# Altium PCB PCB1.PcbDoc
Units mm, origin at the board's own origin, x right, y up, seen from the top; angles counter-clockwise.
Board outline 56 x 65 mm, 4 copper layers (Top Layer, Mid Layer 1, Mid Layer 2, Bottom Layer), stack 1.57 mm thick; 44 components, 38 nets, 199 pads, 66 vias.
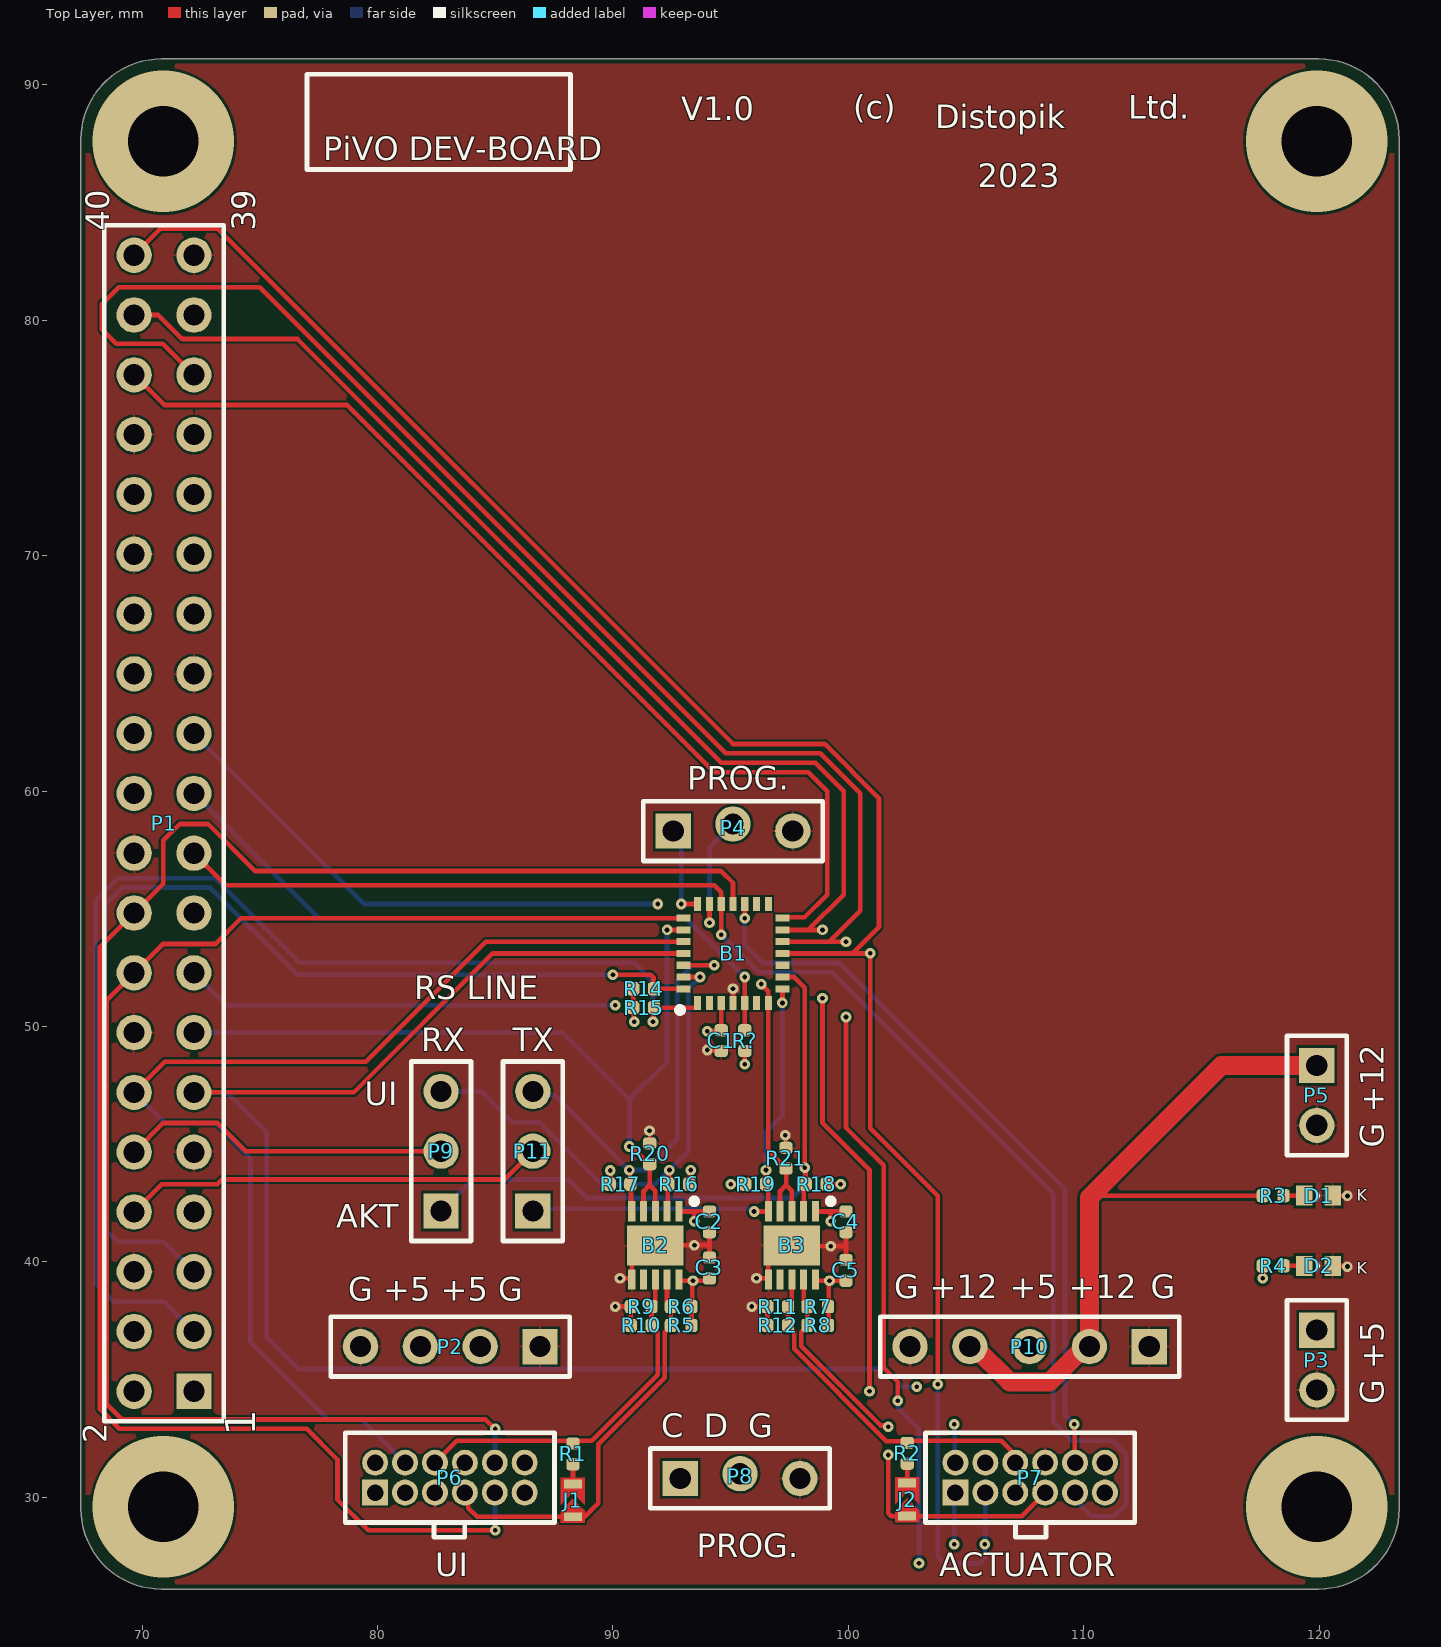
[diagram p0: Top Layer view]
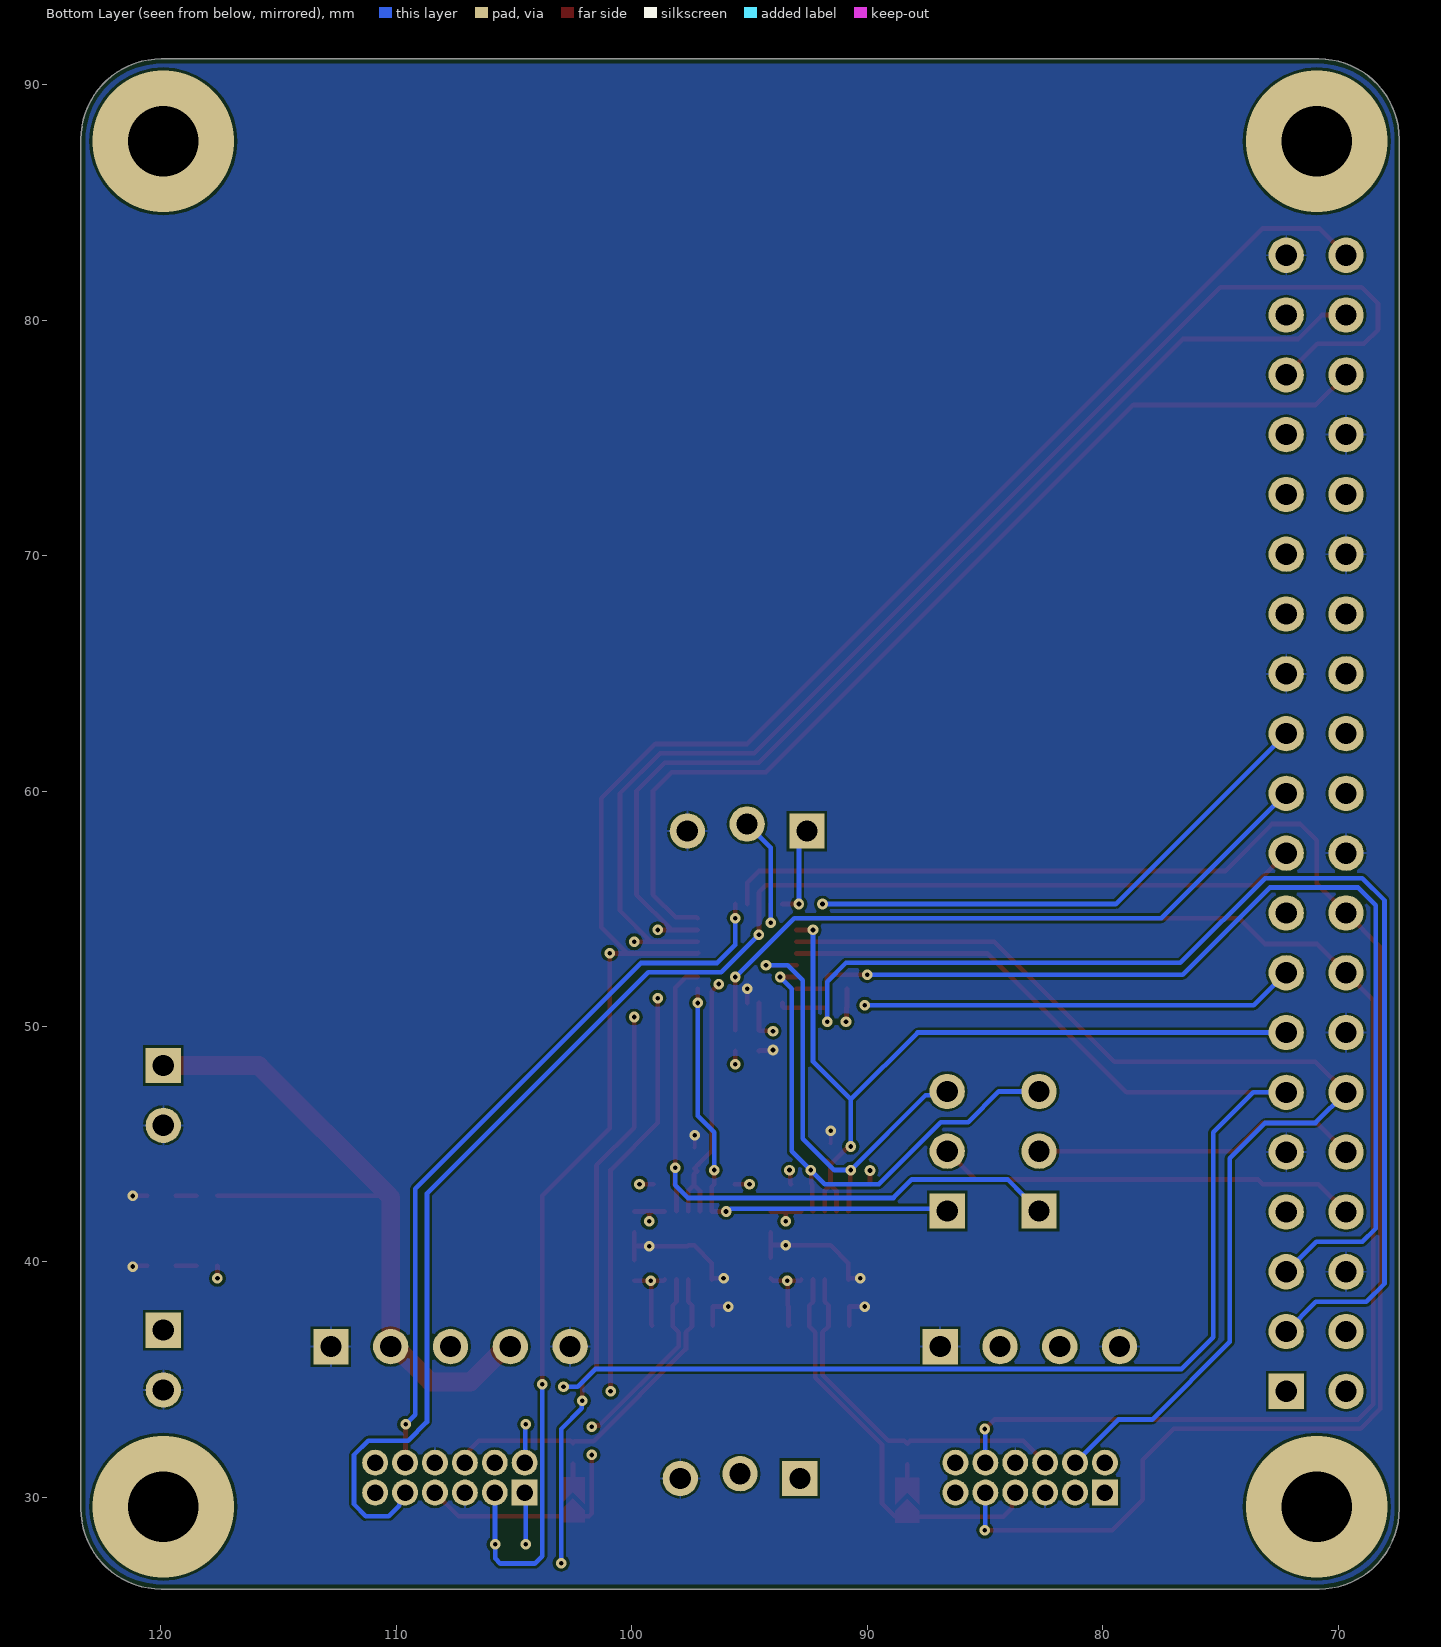
[diagram p1: Bottom Layer view, seen from below]
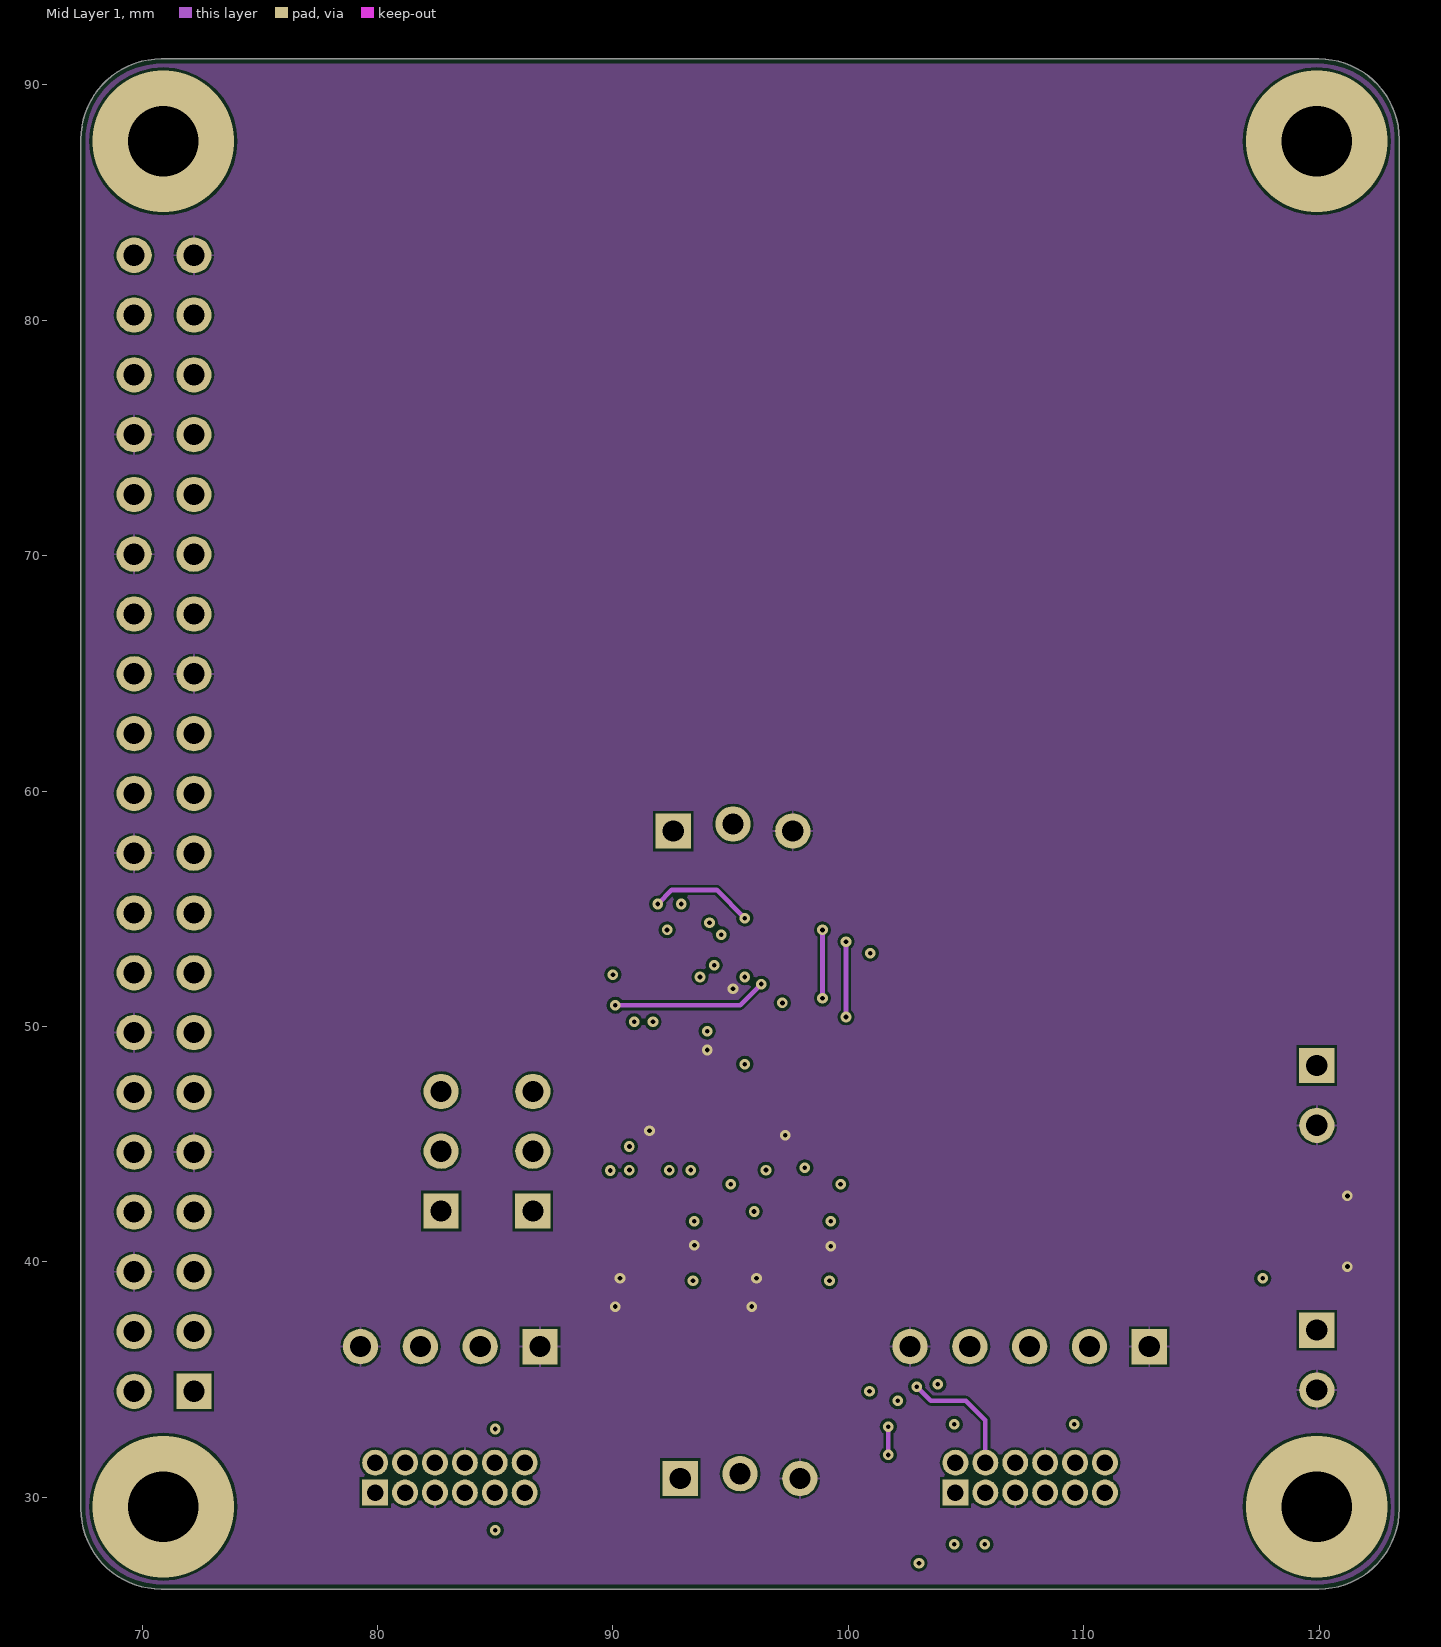
[diagram p2: Mid Layer 1]
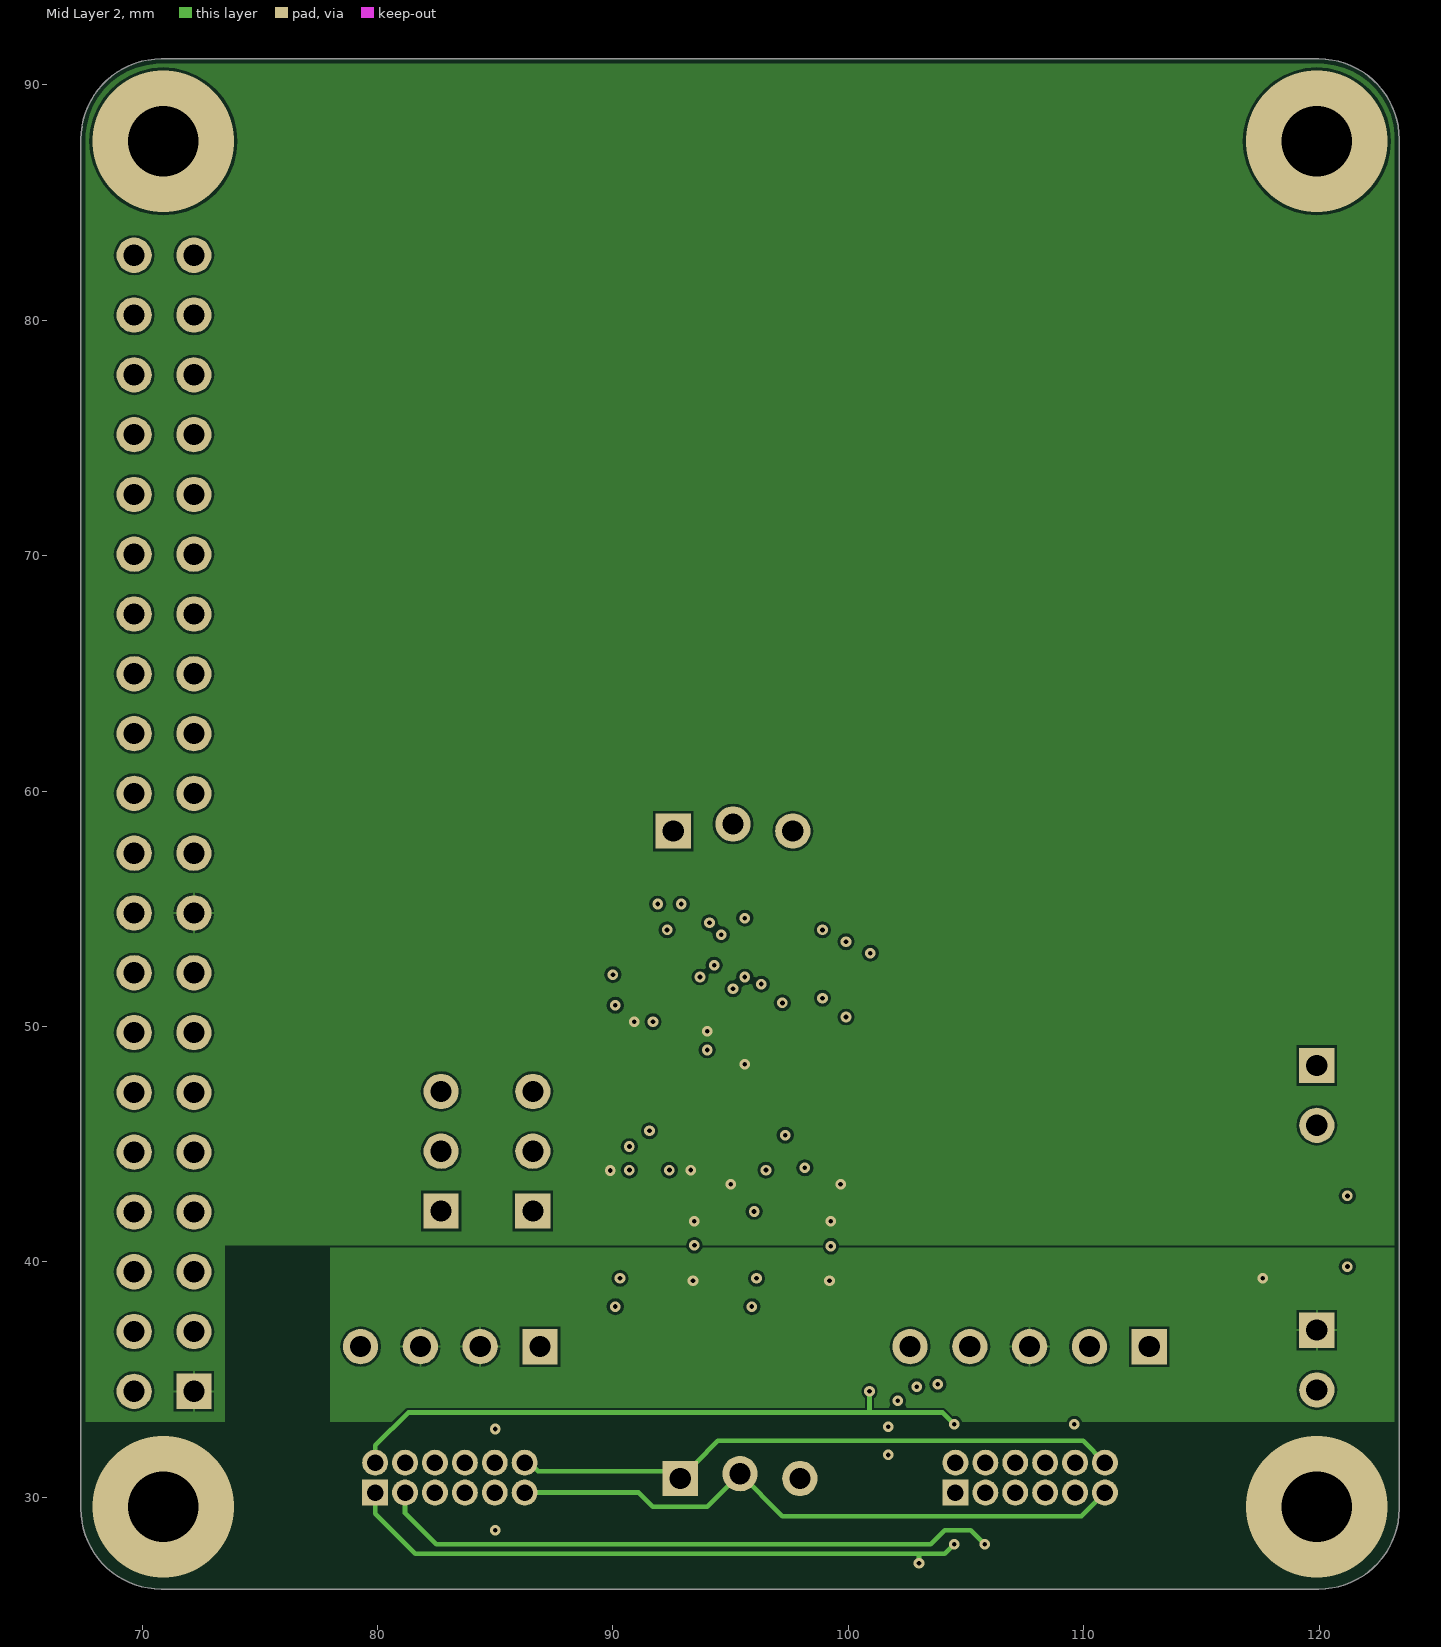
[diagram p3: Mid Layer 2]
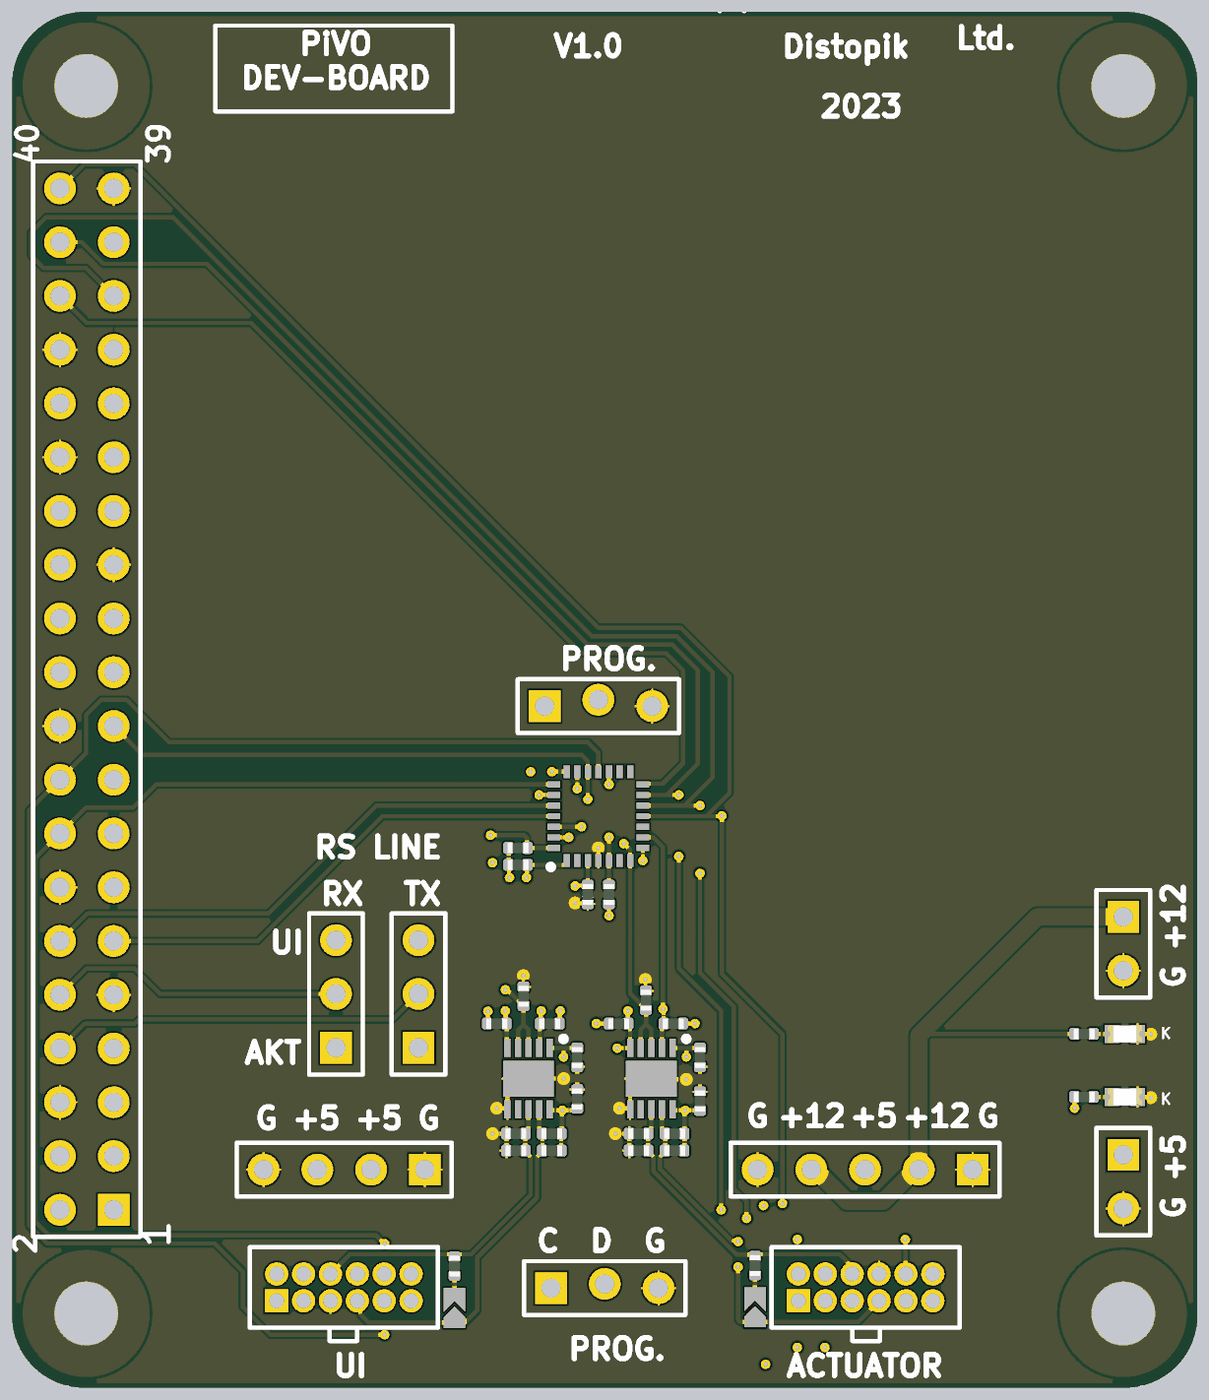
[diagram p4: 3D render of the assembled board from above, using the file's embedded part models]

## Layer stack, top to bottom
Top Solder: solder mask 0.0127, Solder Resist, Dk 3.8
Top Layer: signal copper 0.035
Dielectric 1: prepreg 0.2, 7628, Dk 4.6
Mid Layer 1: signal copper 0.0175
Core: core 1.065, FR-4, Dk 4.5
Mid Layer 2: signal copper 0.0175
Dielectric 2: prepreg 0.2, 7628, Dk 4.6
Bottom Layer: signal copper 0.035
Bottom Solder: solder mask 0.0127, Solder Resist, Dk 3.8

## Board outline
67.4,29.507 ccw(c70.807,29.507) 70.807,26.1 119.986,26.1 ccw(c119.986,29.514) 123.4,29.514 123.4,87.686 ccw(c119.986,87.686) 119.986,91.1 70.814,91.1 ccw(c70.814,87.686) 67.4,87.686

## Design rules (kind name [scope] priority, off if disabled: settings)
BoardOutlineClearance [All] p1: gap=0.2 ignorepadtopadclearanceinfootprint=FALSE
Clearance [All] p1: gap=0.102 ignorepadtopadclearanceinfootprint=FALSE except(0.127: Arc-Via Track-Via SMDPad-Via THPad-Via Via-Via Via-Fill Via-Poly Via-Region Via-Text; 0.25: Arc-Hole Track-Hole SMDPad-Hole THPad-Hole Via-Hole Fill-Hole Poly-Hole Region-Hole Text-Hole)
ComponentClearance [All] p1: gap=0.102 collisioncheckmode=3 verticalgap=0.102 showdistances=TRUE
DiffPairsRouting [All] p1: maxlimit=0.102 minlimit=0.102 mostfreqgap=0.102 toplayer_minwidth=0.102 toplayer_maxwidth=1816.048 toplayer_prefwidth=0.102 midlayer1_minwidth=0.102 midlayer1_maxwidth=1816.048 midlayer1_prefwidth=0.102 midlayer2_minwidth=0.102 midlayer2_maxwidth=1816.048 midlayer2_prefwidth=0.102 bottomlayer_minwidth=0.102 bottomlayer_maxwidth=1816.048 bottomlayer_prefwidth=0.102 maxuncoupledlength=12.7
Height [All] p1: minheight=0 maxheight=1816.048 prefheight=12.7
HoleSize [All] p1: absolutevalues=TRUE maxlimit=6.3 minlimit=0.2 maxpercent=80.000 minpercent=20.000
HoleToHoleClearance [All] p1: gap=0.25 allowstackedmicrovias=FALSE
MinimumAnnularRing [All] p1: minimumring=0.076
MinimumSolderMaskSliver [All] p1: minsoldermaskwidth=0
PlaneClearance [All] p1: clearance=0.102
PlaneConnect PlaneConnectPowerPads [InPadClass('PowerPads')] p1: planeconnectstyle=Direct reliefexpansion=0.508 reliefentries=4 reliefconductorwidth=0.254 reliefairgap=0.254
PlaneConnect [All] p2: pad.planeconnectstyle=Relief pad.reliefexpansion=0.3 pad.reliefentries=4 pad.reliefconductorwidth=0.102 pad.reliefairgap=0.102 via.planeconnectstyle=Direct via.reliefexpansion=0.3 via.reliefentries=4 via.reliefconductorwidth=0.127 via.reliefairgap=0.127
PolygonConnect PolygonConnectPowerPads [All vs (InPadClass('PowerPads'))] p1: connectstyle=Direct reliefconductorwidth=0.254 reliefentries=4 polygonreliefangle="90 Angle" airgapwidth=0.254
PolygonConnect [All] p2: thpad.connectstyle=Relief thpad.reliefconductorwidth=0.102 thpad.reliefentries=4 thpad.polygonreliefangle="90 Angle" thpad.airgapwidth=0.102 smdpad.connectstyle=Relief smdpad.reliefconductorwidth=0.102 smdpad.reliefentries=4 smdpad.polygonreliefangle="90 Angle" smdpad.airgapwidth=0.102 via.connectstyle=Direct via.reliefconductorwidth=0.127 via.reliefentries=4 via.polygonreliefangle="90 Angle" via.airgapwidth=0.127
RoutingVias [All] p1: holewidth=0.2 width=0.45 viastyle="Through Hole" minholewidth=0.2 minwidth=0.45 maxholewidth=6.3 maxwidth=6.55
SilkToSilkClearance [All] p1: silktosilkclearance=0
SilkToSolderMaskClearance [IsPad] p1: minsilkscreentomaskgap=0.102 clearancetoexposedcopper=TRUE
SolderMaskExpansion [All] p1: expansion=0.075 istentingtop=FALSE
Width [All] p1: maxlimit=1816.048 minlimit=0.102 preferedwidth=0.102
20 further rules are at their usual default settings.

## Components (designator, comment, footprint, x,y, rotation, side; value= is the part's Value field where it differs from the comment)
B1 "STM32C031G6U6" QFN50P400X400X60-28N-D 95.1,53.1 r90 top
B2 "XR33202EEHBTR-F" SON50P300X300X80-11N-D 91.8,40.7 r270 top
B3 "XR33202EEHBTR-F" SON50P300X300X80-11N-D 97.6,40.7 r270 top
C1 "100n" R1005_0402i_L 94.6,49.4 r90 top
C2 "100n" R1005_0402i_L 94.1,41.7 r270 top
C3 "100n" R1005_0402i_L 94.1,39.74 r270 top
C4 "100n" R1005_0402i_L 99.9,41.7 r270 top
C5 "100n" R1005_0402i_L 99.9,39.64 r270 top
D1 "LED" LED1608_0603I_L 119.976,42.812 r180 top
D2 "LED" LED1608_0603I_L 119.976,39.834 r180 top
J1 "solder_jumper" solder_jumper_triangle 87.792,30.316 r270 top
J2 "solder_jumper" solder_jumper_triangle 101.992,30.343 r270 top
P1 "RPI Header" HDR2X20 72.2,34.5 r90 top
P2 "UI PWR" HDR1X4 86.9,36.4 r180 top
P3 "5V port" HDR1X2 119.9,37.1 r270 top
P4 "Prog. hat" HDR1X3#1 92.56,58.3 r0 top
P5 "12V port" HDR1X2 119.9,48.34 r270 top
P6 "UI" "1.27mm headet tht" 84.98,31.47 r0 top
P7 "AKT" "1.27mm headet tht" 109.63,31.47 r0 top
P8 "Prog. UI" HDR1X3#2 92.86,30.8 r0 top
P9 "RX changer" HDR1X3#3 82.7,42.16 r90 top
P10 "Header 5" HDR1X5 112.78,36.4 r180 top
P11 "TX changer" HDR1X3#3 86.6,42.16 r90 top
R1 "120" R1005_0402i_L 88.3,31.84 r90 top
R2 "120" R1005_0402i_L 102.5,31.867 r90 top
R3 "~3k" R1005_0402i_L 118.047,42.812 r0 top
R4 "300" R1005_0402i_L 118.047,39.834 r0 top
R5 "3k" R1005_0402i_L 92.9,37.3 r0 top
R6 "3k" R1005_0402i_L 92.9,38.1 r0 top
R7 "3k" R1005_0402i_L 98.7,38.1 r0 top
R8 "3k" R1005_0402i_L 98.7,37.3 r0 top
R9 "3k" R1005_0402i_L 91.2,38.1 r0 top
R10 "3k" R1005_0402i_L 91.2,37.3 r0 top
R11 "3k" R1005_0402i_L 97,38.1 r0 top
R12 "3k" R1005_0402i_L 97,37.3 r0 top
R14 "3k" R1005_0402i_L 91.3,51.6 r180 top
R15 "3k" R1005_0402i_L 91.3,50.8 r180 top
R16 "3k" R1005_0402i_L 92.8,43.3 r0 top
R17 "3k" R1005_0402i_L 90.3,43.3 r180 top
R18 "3k" R1005_0402i_L 98.64,43.3 r0 top
R19 "3k" R1005_0402i_L 96.06,43.3 r180 top
R20 "3k" R1005_0402i_L 91.561,44.589 r270 top
R21 "3k" R1005_0402i_L 97.348,44.403 r270 top
R? "3k" R1005_0402i_L 95.6,49.4 r270 top

## Footprints (in the part's own frame and the unit in brackets; to place one, negate y for a bottom-side part, rotate by r counter-clockwise, add the part's x,y. Pads: shape width x height; smd on the part's side, far side on the other; paste and mask are expansions set on the pad)
"1.27mm headet tht" [mm]
  rect 1.1x1.1 hole 0.7: 1(-5.08,-1.27)
  round 1.1 hole 0.7: 2(-5.08,0) 3(-3.81,-1.27) 4(-3.81,0) 5(-2.54,-1.27) 6(-2.54,0) 7(-1.27,-1.27) 8(-1.27,0) 9(0,-1.27) 10(0,0) 11(1.27,-1.27) 12(1.27,0)
  silkscreen extent -6.35,-2.54 2.54,1.27
HDR1X2 [mm] "Connector; Header; 2 Position"
  rect 1.5x1.5 hole 0.9: 1(0,0)
  round 1.5 hole 0.9: 2(2.54,0)
  silkscreen extent -1.27,-1.27 3.81,1.27
HDR1X3#1 [mm] "Connector; Header; 3 Position"
  rect 1.5x1.5 hole 0.9: 1(0,0)
  round 1.5 hole 0.9: 2(2.54,0.3) 3(5.08,0)
  silkscreen extent -1.27,-1.27 6.35,1.27
HDR1X3#2 [mm] "Connector; Header; 3 Position"
  rect 1.5x1.5 hole 0.9: 1(0,0)
  round 1.5 hole 0.9: 2(2.54,0.2) 3(5.08,0)
  silkscreen extent -1.27,-1.27 6.35,1.27
HDR1X3#3 [mm] "Connector; Header; 3 Position"
  rect 1.5x1.5 hole 0.9: 1(0,0)
  round 1.5 hole 0.9: 2(2.54,0) 3(5.08,0)
  silkscreen extent -1.27,-1.27 6.35,1.27
HDR1X4 [mm] "Connector; Header; 4 Position"
  rect 1.5x1.5 hole 0.9: 1(0,0)
  round 1.5 hole 0.9: 2(2.54,0) 3(5.08,0) 4(7.62,0)
  silkscreen extent -1.27,-1.27 8.89,1.27
HDR1X5 [mm] "Connector; Header; 5 Position"
  rect 1.5x1.5 hole 0.9: 1(0,0)
  round 1.5 hole 0.9: 2(2.54,0) 3(5.08,0) 4(7.62,0) 5(10.16,0)
  silkscreen extent -1.27,-1.27 11.43,1.27
HDR2X20 [mm] "Connector; Header; 20x2 Position"
  rect 1.5x1.5 hole 0.9: 1(0,0)
  round 1.5 hole 0.9: 2(0,2.54) 3(2.54,0) 4(2.54,2.54) 5(5.08,0) 6(5.08,2.54) 7(7.62,0) 8(7.62,2.54) 9(10.16,0) 10(10.16,2.54) 11(12.7,0) 12(12.7,2.54) 13(15.24,0) 14(15.24,2.54) 15(17.78,0) 16(17.78,2.54) 17(20.32,0) 18(20.32,2.54) 19(22.86,0) 20(22.86,2.54) 21(25.4,0) 22(25.4,2.54) 23(27.94,0) 24(27.94,2.54) 25(30.48,0) 26(30.48,2.54) 27(33.02,0) 28(33.02,2.54) 29(35.56,0) 30(35.56,2.54) 31(38.1,0) 32(38.1,2.54) 33(40.64,0) 34(40.64,2.54) 35(43.18,0) 36(43.18,2.54) 37(45.72,0) 38(45.72,2.54) 39(48.26,0) 40(48.26,2.54)
  silkscreen extent -1.27,-1.27 49.53,3.81
LED1608_0603I_L [mm] "SMD LED, 2-Leads, Body 1.57x0.85mm, IPC High Density"
  rect 0.7x0.85 smd: 1(-0.6,0) 2(0.6,0)
  silkscreen extent -0.07,-0.3 0.08,0.3, body extent -0.8,-0.4 0.8,0.4, height 0.7
QFN50P400X400X60-28N-D [mm]
  rect 0.6x0.3 smd: 1(-2.1,1.5) 2(-2.1,1) 3(-2.1,0.5) 4(-2.1,0) 5(-2.1,-0.5) 6(-2.1,-1) 7(-2.1,-1.5) 15(2.1,-1.5) 16(2.1,-1) 17(2.1,-0.5) 18(2.1,0) 19(2.1,0.5) 20(2.1,1) 21(2.1,1.5)
  rect 0.3x0.6 smd: 8(-1.5,-2.1) 9(-1,-2.1) 10(-0.5,-2.1) 11(0,-2.1) 12(0.5,-2.1) 13(1,-2.1) 14(1.5,-2.1) 22(1.5,2.1) 23(1,2.1) 24(0.5,2.1) 25(0,2.1) 26(-0.5,2.1) 27(-1,2.1) 28(-1.5,2.1)
  silkscreen extent -2.52,2.12 -2.28,2.37
R1005_0402i_L [mm] "Resistor, Chip; 1.00 mm L X 0.50 mm W X 0.40 mm H body"
  rrect50% 0.52x0.56 smd: 1(-0.44,0) 2(0.44,0)
  body extent -0.5,-0.25 0.5,0.25, height 0.4
solder_jumper_triangle [mil]
  rect 15x30 smd paste+0 mask+0: 1(45,20) 2(-10,20)
  Top Layer region: 5,20 25,40 -20,40 -20,0 25,0
  Top Layer region: 55,40 35,40 15,20 35,0 55,0
SON50P300X300X80-11N-D [mm]
  rect 0.85x0.3 smd: 1(-1.45,1) 2(-1.45,0.5) 3(-1.45,0) 4(-1.45,-0.5) 5(-1.45,-1) 6(1.45,-1) 7(1.45,-0.5) 8(1.45,0) 9(1.45,0.5) 10(1.45,1)
  rect 1.7x2.4 smd: 11(0,0)
  silkscreen extent -2,1.53 -1.75,1.78

## Part data
B1: "Mainstream Arm Cortex-M0+ MCU with 32 Kbytes of Flash memory, 12 Kbytes RAM, 48 MHz CPU, 2x USART, timers, ADC, comm. I/F, 2-3.6V", Manufacturer_Name=STMicroelectronics, Mouser Part Number=511-STM32C031G6U6, Datasheet Link=https://www.st.com/resource/en/datasheet/stm32c031c4.pdf, Geometry.Height=0.6mm, Manufacturer_Part_Number=STM32C031G6U6, Mouser Price/Stock=https://www.mouser.co.uk/ProductDetail/STMicroelectronics/STM32C031G6U6?qs=IPgv5n7u5QZqRf3nOTChhw%3D%3D
B2 B3: "RS-422/RS-485 Interface IC Wide Supply Trans with I/O Interface", Manufacturer_Name="MaxLinear, Inc.", Mouser Part Number=701-XR33202EEHBTR-F, Datasheet Link=https://www.maxlinear.com/ds/xr33202.pdf, Geometry.Height=0.8mm, Manufacturer_Part_Number=XR33202EEHBTR-F, Mouser Price/Stock=https://www.mouser.co.uk/ProductDetail/MaxLinear/XR33202EEHBTR-F?qs=GtWAI9k6EVi4nRW8bj1LFw%3D%3D
C1 C2 C3 C4 C5: library part C, "Capacitor"
P1: library part "Header 20X2", "Header, 20-Pin, Dual row", LatestRevisionDate=17-Jul-2002, LatestRevisionNote="Re-released for DXP Platform.", Publisher="Altium Limited"
P2: library part "Header 4", "Header, 4-Pin", LatestRevisionDate=17-Jul-2002, LatestRevisionNote="Re-released for DXP Platform.", Publisher="Altium Limited"
P3 P5: library part "Header 2", "Header, 2-Pin", LatestRevisionDate=17-Jul-2002, LatestRevisionNote="Re-released for DXP Platform.", Publisher="Altium Limited"
P4 P8 P9 P11: library part "Header 3", "Header, 3-Pin", LatestRevisionDate=17-Jul-2002, LatestRevisionNote="Re-released for DXP Platform.", Publisher="Altium Limited"
P6 P7: library part "2x6 THT Header"
P10: "Header, 5-Pin", LatestRevisionDate=17-Jul-2002, LatestRevisionNote="Re-released for DXP Platform.", Publisher="Altium Limited"
R1 R2 R3 R4 R5 R6 R7 R8 R9 R10 R11 R12 R14 R15 R16 R17 R18 R19 R20 R21 R?: library part R, "R"

## Via types
v1: diameter 0.45, hole 0.2, Top Layer to Bottom Layer, 62 vias
v2: diameter 6, hole 3, Top Layer to Bottom Layer, 4 vias

## Nets (pads, with @x,y where several pads share a name; then routed paths per layer and width w, separated by ;. In a path a pad name is that pad's centre, name@x,y a point inside that pad or via, vN(x,y) a via of type N, cw(c..) or ccw(c..) an arc to the next point about the centre after c; other vN are vias at no path point)
+3V3: B1.3 B2.1 B3.1 C1.2 C2.1 C4.1 P1.1 P1.17 R14.2 R15.2 R16.2 R17.2 R18.2 R19.2 R?.2 | length 9.6
  Top Layer w0.2: R17.2 89.88,43.32 v1(89.88,43.88) ; R14.2 R15.2 90.88,50.78 90.88,50.22 v1(90.9,50.2) ; B2.1 92.81,42.14 93.455,42.14 ; R16.2 93.27,43.33 93.27,43.87 v1(93.3,43.9) ; v1(93.454,41.72) v1(93.454,41.72) 93.455,42.14 ; v1(94,49.8) 94.02,49.82 94.58,49.82 C1.2 B1.3 ; C2.1 93.455,42.14 ; v1(95,43.3) R19.2 ; v1(95.6,48.4) R?.2 ; B3.1 98.61,42.14 99.255,42.14 ; R18.2 v1(99.671,43.3) ; v1(99.256,41.724) 99.256,42.139 99.255,42.14 ; C4.1 99.255,42.14
+5: B2.10 B3.10 C3.2 C5.2 P2.2 P2.3 P3.1 P10.3 R4.1 R5.2 R6.2 R7.2 R8.2 | length 7.1
  Top Layer w0.2: B2.10 92.85,39.2 v1(93.4,39.2) ; R5.2 93.32,37.32 93.34,37.34 R6.2 93.37,38.13 93.37,39.17 v1(93.4,39.2) ; C3.2 94,39.2 v1(93.4,39.2) ; B3.10 98.65,39.2 v1(99.2,39.2) ; R8.2 99.17,37.33 99.17,39.17 v1(99.2,39.2) ; C5.2 v1(99.2,39.2) ; v1(117.6,39.3) 117.6,39.834 R4.1
+12: P5.1 P10.2 P10.4 R3.1 | length 31.9
  Top Layer w0.2: 110.24,42.74 110.312,42.812 R3.1
  Top Layer w0.8: P10.4 105.349,36.4 106.849,34.9 108.551,34.9 110.051,36.4 P10.2 110.24,42.74 ; 110.312,42.812 115.84,48.34 P5.1
AKT_A_N: B3.8 P7.6 R2.2 R11.2 R12.2 | length 14.8
  Top Layer w0.2: B3.8 97.6,38.306 97.44,38.146 R11.2 97.44,37.264 97.7,37.004 97.7,36.3 101.618,32.382 102.425,32.382 R2.2 102.593,32.4 106.5,32.4 106.918,31.982 106.918,31.642 P7.6
AKT_B_P: B3.9 J2.1 P7.7 R7.1 R8.1 | length 18.9
  Top Layer w0.2: B3.9 98.1,38.306 98.26,38.146 R7.1 98.26,37.264 98.002,37.005 98.002,36.425 101.313,33.113 101.379,33.048 101.652,33.048 v1(101.7,33) ; v1(101.7,31.8) 101.7,29.317 101.817,29.2 J2.1 107.36,29.2 P7.7
  Mid Layer 1 w0.2: v1(101.7,31.8) v1(101.7,33)
AKT_INT: B1.17 P1.23 P7.10 | length 58.6
  Top Layer w0.2: v1(95.6,54.6) B1.17 ; v1(109.6,33.1) 109.615,33.085 109.615,31.485 P7.10
  Mid Layer 1 w0.2: v1(91.9,55.2) 92.5,55.8 94.4,55.8 v1(95.6,54.6)
  Bottom Layer w0.2: P1.23 79.44,55.2 v1(91.9,55.2) ; v1(95.6,54.6) 95.6,53.461 96.365,52.696 99.604,52.696 109.2,43.1 109.2,33.5 v1(109.6,33.1)
AKT_R\E\S\E\T\: B1.19 P1.19 P7.9 | length 62
  Top Layer w0.2: P1.19 73.56,56 94.3,56 94.6,55.7 B1.19 v1(94.6,53.9)
  Bottom Layer w0.2: v1(94.6,53.9) 96.2,52.3 99.3,52.3 108.7,42.9 108.7,33.2 109.5,32.4 111.2,32.4 111.8,31.8 111.8,29.7 111.3,29.2 110.324,29.2 109.878,29.646 109.878,29.708 109.63,29.956 P7.9
AKT_RS485_DE: B1.7 B3.3 B3.4 P1.15 R21.2 | length 36.4
  Top Layer w0.2: v1(96.3,51.8) 96.6,51.5 B1.7 96.6,44.711 97.168,44.143 97.168,44.14 97.344,43.963 R21.2 ; B3.4 97.1,43.006 97.351,43.257 97.358,43.257 ; R21.2@97.223,43.858 97.358,43.723 97.358,43.257 ; B3.3 97.6,43.015 97.358,43.257
  Mid Layer 1 w0.2: v1(90.1,50.9) 95.4,50.9 v1(96.3,51.8)
  Bottom Layer w0.2: P1.15 73.58,50.9 v1(90.1,50.9)
AKT_RS485_RX: B1.9 B3.2 P9.1 R18.1 | length 28
  Top Layer w0.2: B1.9 97.7,52.1 98.151,51.649 v1(98.151,43.992) 98.176,43.968 98.176,43.324 R18.1 98.1,43.2 B3.2
  Bottom Layer w0.2: P9.1 83.35,42.81 84.04,43.5 88.1,43.5 88.885,42.715 97.615,42.715 98.15,43.25 v1@98.15,43.991
AKT_RS485_TX: B1.8 B3.5 P11.1 R19.1 | length 19.9
  Top Layer w0.2: v1(95.995,42.14) 96.59,42.14 B3.5 96.6,43.2 R19.1 v1(96.5,43.9) ; v1(97.2,51) B1.8
  Bottom Layer w0.2: P11.1 86.699,42.259 95.809,42.259 95.927,42.14 v1(95.995,42.14) ; v1(96.5,43.9) 96.5,45.5 97.2,46.2 v1(97.2,51)
AKT_S\S\: B1.25 P1.11 P7.4 | length 69.5
  Top Layer w0.2: P1.11 79,47.2 84.9,53.1 B1.25
  Mid Layer 1 w0.2: v1(102.9,34.7) 103.496,34.104 104.996,34.104 105.82,33.28 P7.4
  Bottom Layer w0.2: P1.11 73.6,47.2 75.3,45.5 75.3,36.8 76.652,35.448 101.552,35.448 102.3,34.7 v1(102.9,34.7)
AKT_SWCLK: P6.12 P7.12 P8.1 | length 26
  Mid Layer 2 w0.2: P6.12 86.447,31.47 86.817,31.1 92.56,31.1 P8.1 93.51,31.45 94.46,32.4 109.97,32.4 P7.12
AKT_SWDIO: P6.11 P7.11 P8.2 | length 26.6
  Mid Layer 2 w0.2: P6.11 91.1,30.2 91.7,29.6 94,29.6 P8.2 97.2,29.2 109.9,29.2 P7.11
GND: B1.4 B2.6 B2.11 B3.6 B3.11 C1.1 C2.2 C3.1 C4.2 C5.1 D1.1 D2.1 P1.6 P1.9 P1.14 P1.20 P1.25 P1.30 P1.34 P1.39 P2.1 P2.4 P3.2 P4.3 P5.2 P6.5 P6.8 P7.5 P7.8 P8.3 P10.1 P10.5 R9.1 R10.1 R11.1 R12.1 R20.1 R21.1 | length 18.5
  Top Layer w0.15: v1(91.551,45.564) 91.556,45.559 91.556,45.034 R20.1 ; v1(97.32,45.38) 97.334,45.366 97.334,44.858 R21.1
  Top Layer w0.2: v1(90.1,38.1) R9.1 R10.1 ; v1(90.3,39.3) 90.75,39.3 B2.6 90.8,39.95 91.55,40.7 B2.11 ; B2.11 v1(93.462,40.7) 93.482,40.72 94.1,40.72 ; v1(94,49) 94.02,48.98 94.58,48.98 C1.1 ; C3.1 94.1,40.72 ; C2.2 94.1,40.72 ; B1.4 v1(95.1,51.6) ; v1(95.9,38.1) R11.1 R12.1 ; v1(96.1,39.3) 96.55,39.3 B3.6 96.6,39.95 97.35,40.7 B3.11 97.636,40.664 v1(99.256,40.664) 99.263,40.67 99.9,40.67 ; C5.1 99.9,40.67 ; C4.2 99.9,40.67 ; D2.1 121.2,39.834 v1(121.2,39.8) ; D1.1 121.2,42.812 v1(121.2,42.8)
NetB1_20: B1.20 P4.2 | length 5.4
  Top Layer w0.2: v1(94.1,54.4) B1.20
  Bottom Layer w0.2: v1(94.1,54.4) 94.1,57.6 P4.2
NetB1_21: B1.21 P4.1 | length 3.9
  Top Layer w0.2: v1(92.9,55.2) B1.21
  Bottom Layer w0.2: P4.1 92.9,57.96 v1(92.9,55.2)
NetD1_2: D1.2 R3.2 | length 0.9
  Top Layer w0.2: R3.2 D1.2
NetD2_2: D2.2 R4.2 | length 0.9
  Top Layer w0.2: R4.2 D2.2
NetJ1_2: J1.2 R1.1 | length 0.8
  Top Layer w0.2: J1.2 R1.1
NetJ2_2: J2.2 R2.1 | length 0.6
  Top Layer w0.2: 102.5,30.851 R2.1
RPI_RS_SIDE: P1.7
RPI_RX: P1.10 P9.2 | length 14.1
  Top Layer w0.2: P1.10 70.9,45.9 73.2,45.9 74.4,44.7 P9.2
RPI_SCL: B1.28 P1.5 R14.1 | length 45.3
  Top Layer w0.2: v1(90,52.2) 91.603,52.2 91.72,52.083 91.72,51.62 R14.1 B1.28
  Bottom Layer w0.2: P1.5 70.924,40.856 68.961,40.856 68.4,41.417 68.4,55.152 69.148,55.9 72.9,55.9 76.6,52.2 v1(90,52.2)
RPI_SDA: B1.1 P1.3 R15.1 | length 51.5
  Top Layer w0.2: v1(91.7,50.2) 91.72,50.22 91.72,50.78 R15.1 93.55,50.8 93.6,50.85 B1.1
  Bottom Layer w0.2: P1.3 70.94,38.3 68.8,38.3 68.025,39.075 68.025,55.361 68.964,56.3 73.1,56.3 76.7,52.7 90.9,52.7 91.7,51.9 v1(91.7,50.2)
RPI_TX: P1.8 P11.2 | length 18
  Top Layer w0.2: P1.8 70.84,43.3 73.2,43.3 73.4,43.5 85.4,43.5 P11.2
SPI_MISO: B1.12 P1.35 P6.1 P7.1 | length 113.4
  Top Layer w0.2: P1.35 70.88,79 68.9,79 68.3,79.6 68.3,80.7 69,81.4 75,81.4 94.8,61.6 98.8,61.6 100.5,59.9 100.5,54.912 99.188,53.6 ; B1.12 99.188,53.6 ; v1(99.9,50.4) 99.9,45.7 101.5,44.1 101.5,35.5 102.1,34.9 v1(102.1,34.1) ; v1(99.9,53.6) 99.188,53.6
  Mid Layer 1 w0.2: v1(99.9,50.4) v1(99.9,53.6)
  Mid Layer 2 w0.2: P6.1 79.9,29.3 81.6,27.6 103,27.6 ; v1(103,27.2) 103,27.6 ; v1(104.5,28) 104.1,27.6 103,27.6
  Bottom Layer w0.2: v1(102.1,34.1) 102.121,34.079 102.121,33.779 103,32.9 v1(103,27.2) ; v1(104.5,28) 104.5,30.15 P7.1
SPI_MOSI: B1.13 P1.38 P6.2 P7.2 | length 95.8
  Top Layer w0.2: P1.38 70.68,80.22 71.7,79.2 76.6,79.2 94.6,61.2 98.6,61.2 99.8,60 99.8,55.6 98.3,54.1 ; B1.13 98.3,54.1 ; v1(98.9,51.2) 98.9,45.9 100.9,43.9 v1(100.9,34.5) ; v1(98.9,54.1) 98.3,54.1
  Mid Layer 1 w0.2: v1(98.9,51.2) v1(98.9,54.1)
  Mid Layer 2 w0.2: P6.2 79.903,31.473 79.903,32.203 81.3,33.6 100.9,33.6 ; v1(100.9,34.5) 100.9,33.6 ; v1(104.5,33.1) 104,33.6 100.9,33.6
  Bottom Layer w0.2: v1(104.5,33.1) 104.525,33.075 104.525,31.495 P7.2
SPI_SCK: B1.11 P1.40 P6.3 P7.3 | length 111.4
  Top Layer w0.2: P1.40 70.8,83.9 73.2,83.9 95.1,62 99,62 101.3,59.7 101.3,54.21 100.19,53.1 ; B1.11@97.176,53.124 B1.11 100.19,53.1 ; v1(103.8,34.8) 103.8,42.8 100.934,45.666 v1(100.934,53.115) 100.918,53.1 100.19,53.1
  Mid Layer 2 w0.2: P6.3 81.17,29.33 82.5,28 103.5,28 104.1,28.6 105.2,28.6 v1(105.8,28)
  Bottom Layer w0.2: v1(103.8,34.8) 103.798,34.798 103.798,27.502 104.117,27.183 105.583,27.183 105.8,27.4 v1(105.8,28) 105.81,28.01 105.81,30.19 P7.3
STM_RST: B1.5 P1.21 R?.1 | length 28.9
  Top Layer w0.2: R?.1 B1.5 v1(95.6,52.1)
  Bottom Layer w0.2: P1.21 77.5,54.6 93.1,54.6 v1(95.6,52.1)
STM_S\S\: B1.14 P1.36 | length 43.5
  Top Layer w0.2: P1.36 70.94,76.4 78.7,76.4 94.3,60.8 98.3,60.8 99.1,60 99.1,55.6 98.137,54.637 97.237,54.637 B1.14
UI_A_N: B2.8 P6.6 R1.2 R9.2 R10.2 | length 15.3
  Top Layer w0.2: P6.6 83.37,32.4 88.18,32.4 R1.2 88.42,32.4 89.1,32.4 91.9,35.2 91.9,37.004 91.64,37.264 R9.2 91.64,38.146 91.8,38.306 B2.8
UI_B_P: B2.9 J1.1 P6.7 R5.1 R6.1 | length 17
  Top Layer w0.2: P6.7 83.856,30.054 83.856,29.544 84.227,29.173 J1.1 ; 88.808,29.173 89.373,29.738 89.373,32.246 92.202,35.075 92.202,37.005 92.46,37.264 R6.1 92.46,38.146 92.3,38.306 B2.9
UI_INT: B1.22 P1.16 P6.10 | length 61.5
  Top Layer w0.2: v1(85,32.9) 84.6,33.3 69.155,33.3 68.502,33.953 68.502,51.122 P1.16 70.88,53.5 73.1,53.5 74.2,54.6 91.8,54.6 B1.22
  Bottom Layer w0.2: P6.10 84.99,31.48 84.99,32.89 v1(85,32.9)
UI_R\E\S\E\T\: B1.18 P1.18 P6.9 | length 73.2
  Top Layer w0.2: v1(85,28.6) 79.6,28.6 78.3,29.9 78.3,31.6 76.987,32.913 69.038,32.913 68.2,33.751 68.2,53.36 P1.18 70.9,56.06 70.9,57.9 71.6,58.6 72.8,58.6 74.8,56.6 94.6,56.6 95.1,56.1 B1.18
  Bottom Layer w0.2: P6.9 84.99,30.19 84.99,28.61 v1(85,28.6)
UI_RS485_DE: B1.23 B2.3 B2.4 P1.13 R20.2 | length 35
  Top Layer w0.2: v1(90.7,44.9) 90.748,44.852 90.839,44.852 91.541,44.149 R20.2 ; B2.4 91.3,43.006 91.551,43.257 91.558,43.257 ; R20.2@91.581,44.149 R20.2 ; R20.2@91.703,44.291 R20.2 ; B2.3 91.8,43.015 91.558,43.257 ; v1(92.3,54.1) B1.23 ; 91.558,43.257 91.558,44.146 R20.2
  Bottom Layer w0.2: P1.13 87.86,49.74 90.7,46.9 ; v1(90.7,44.9) 90.7,46.9 ; v1(92.3,54.1) 92.3,48.5 90.7,46.9
UI_RS485_RX: B1.27 B2.2 P9.3 R16.1 | length 22.8
  Top Layer w0.2: B2.2 92.33,42.18 92.33,43.27 R16.1 92.38,43.32 92.38,43.88 v1(92.4,43.9) ; B1.27 v1(93.7,52.1)
  Bottom Layer w0.2: P9.3 84.406,47.24 85.715,45.931 86.869,45.931 89.5,43.3 91.8,43.3 v1(92.4,43.9) 93.2,44.7 93.2,51.6 v1(93.7,52.1)
UI_RS485_TX: B1.26 B2.5 P11.3 R17.1 | length 19.9
  Top Layer w0.2: P11.3 P11.3@86.762,47.078 ; v1(90.7,43.9) 90.72,43.88 90.72,43.32 R17.1 90.77,43.27 90.77,42.18 B2.5 ; B1.26 v1(94.3,52.6)
  Bottom Layer w0.2: P11.3 86.762,47.078 87.522,47.078 v1(90.7,43.9) 91.4,43.9 92.738,45.238 92.738,51.957 93.381,52.6 v1(94.3,52.6)
UI_S\S\: B1.24 P1.12 P6.4 | length 48.6
  Top Layer w0.2: P1.12 70.96,48.5 79.506,48.5 84.606,53.6 B1.24
  Bottom Layer w0.2: P1.12 70.96,45.9 73.1,45.9 74.6,44.4 74.6,36.6 77.9,33.3 79.34,33.3 P6.4
pads on no net: B1.2 B1.6 B1.10 B1.15 B1.16 B2.7 B3.7 P1.2 P1.4 P1.22 P1.24 P1.26 P1.27 P1.28 P1.29 P1.31 P1.32 P1.33 P1.37
copper on no net:
  other v2: 70.9,29.6 119.9,29.6 70.9,87.6 119.9,87.6

## Polygon pours and split planes (outlines as drawn)
+5 on Mid Layer 2 "NONET_L-01_P-001" (solid, remove dead copper, pour order 4): 67.4,33.2 123.4,33.2 123.4,40.7 78,40.7 78,33.2
+3V3 on Mid Layer 2 "NONET_L-01_P-001" (solid, remove dead copper, pour order 3): 123.4,40.7 123.4,91.1 67.4,91.1 67.4,40.7 67.4,33.2 73.5,33.2 73.5,40.7
GND on Mid Layer 1 "NONET_L-01_P-001" (solid, remove dead copper, pour order 2): 123.4,26.1 123.4,91.1 67.4,91.1 67.4,26.1
GND on Bottom Layer "NONET_L-01_P-001" (solid, remove dead copper, pour order 1): 123.4,26.1 123.4,91.1 67.4,91.1 67.4,26.1
GND on Top Layer "NONET_L-01_P-001" (solid, remove dead copper, pour order 0): 123.4,26.1 123.4,91.1 67.4,91.1 67.4,26.1

## Silkscreen, mask and mechanical layers (free items; w line width, h text height)
Top Overlay:
  lines w0.2: 77,89.85 77,90.45 ; 82.4,28.9 82.4,28.3 83.7,28.3 83.7,28.85 ; 88.2,90.35 88.2,90.45 ; 107.1,28.9 107.1,28.3 108.4,28.3 108.4,28.85 ; 77,90.45 77,86.4 88.2,86.4 88.2,90.45 ; 77,90.45 88.2,90.45
  text "(c)" at 100.2,88.55 h1
  text "Ltd." at 111.9,88.55 h1
  text "V1.0" at 92.9,88.5 h1
  text "Distopik" at 103.7,88.15 h1
  text "PiVO DEV-BOARD" at 77.698,86.8 h1
  text "2023" at 105.5,85.65 h1
  text "PROG." at 93.154,60.054 h1
  text "RS LINE" at 81.554,51.154 h1
  text "RX" at 81.854,48.954 h1
  text "TX" at 85.754,48.954 h1
  text "UI" at 79.454,46.654 h1
  text "G +12" at 122.746,44.854 h1 r90
  text "AKT" at 78.254,41.454 h1
  text "G" at 101.954,38.454 h1
  text "+12" at 103.454,38.454 h1
  text "+5" at 106.854,38.454 h1
  text "+12" at 109.354,38.454 h1
  text "G" at 112.854,38.454 h1
  text "G +5 +5 G" at 78.758,38.354 h1
  text "G +5" at 122.746,33.954 h1 r90
  text "C  D  G" at 92.054,32.554 h1
  text "PROG." at 93.554,27.454 h1
  text "UI" at 82.454,26.654 h1
  text "ACTUATOR" at 103.854,26.654 h1
Mechanical 1:
  lines w0.2: 67.4,29.507 ccw(c70.807,29.507) 70.807,26.1 96.3,26.1 119.986,26.1 ccw(c119.986,29.514) 123.4,29.514 123.4,87.686 ccw(c119.986,87.686) 119.986,91.1 70.814,91.1 ccw(c70.814,87.686) 67.4,87.686 67.4,29.507

## Text inside footprints (layer, text, board x,y; h text height)
D1: Top Overlay "K" at 121.6,42.6 h0.5
D2: Top Overlay "K" at 121.6,39.5 h0.5
P1: Top Overlay "2" at 68.5,32.3 h1 r90; Top Overlay "40" at 68.6,83.8 h1 r90; Top Overlay "1" at 74.804,32.616 h1.27 r90; Top Overlay "39" at 74.8,83.8 h1 r90